# Altium PCB nails_PCB_v2_rectangles_no_grouns.PcbDoc
Units mm, origin at the board's own origin, x right, y up, seen from the top; angles counter-clockwise.
Board outline 16.25 x 42.65 mm, 4 copper layers (Top Layer, Mid-Layer 1, Internal Plane 1, Bottom Layer); 42 components, 49 nets, 225 pads, 94 vias.
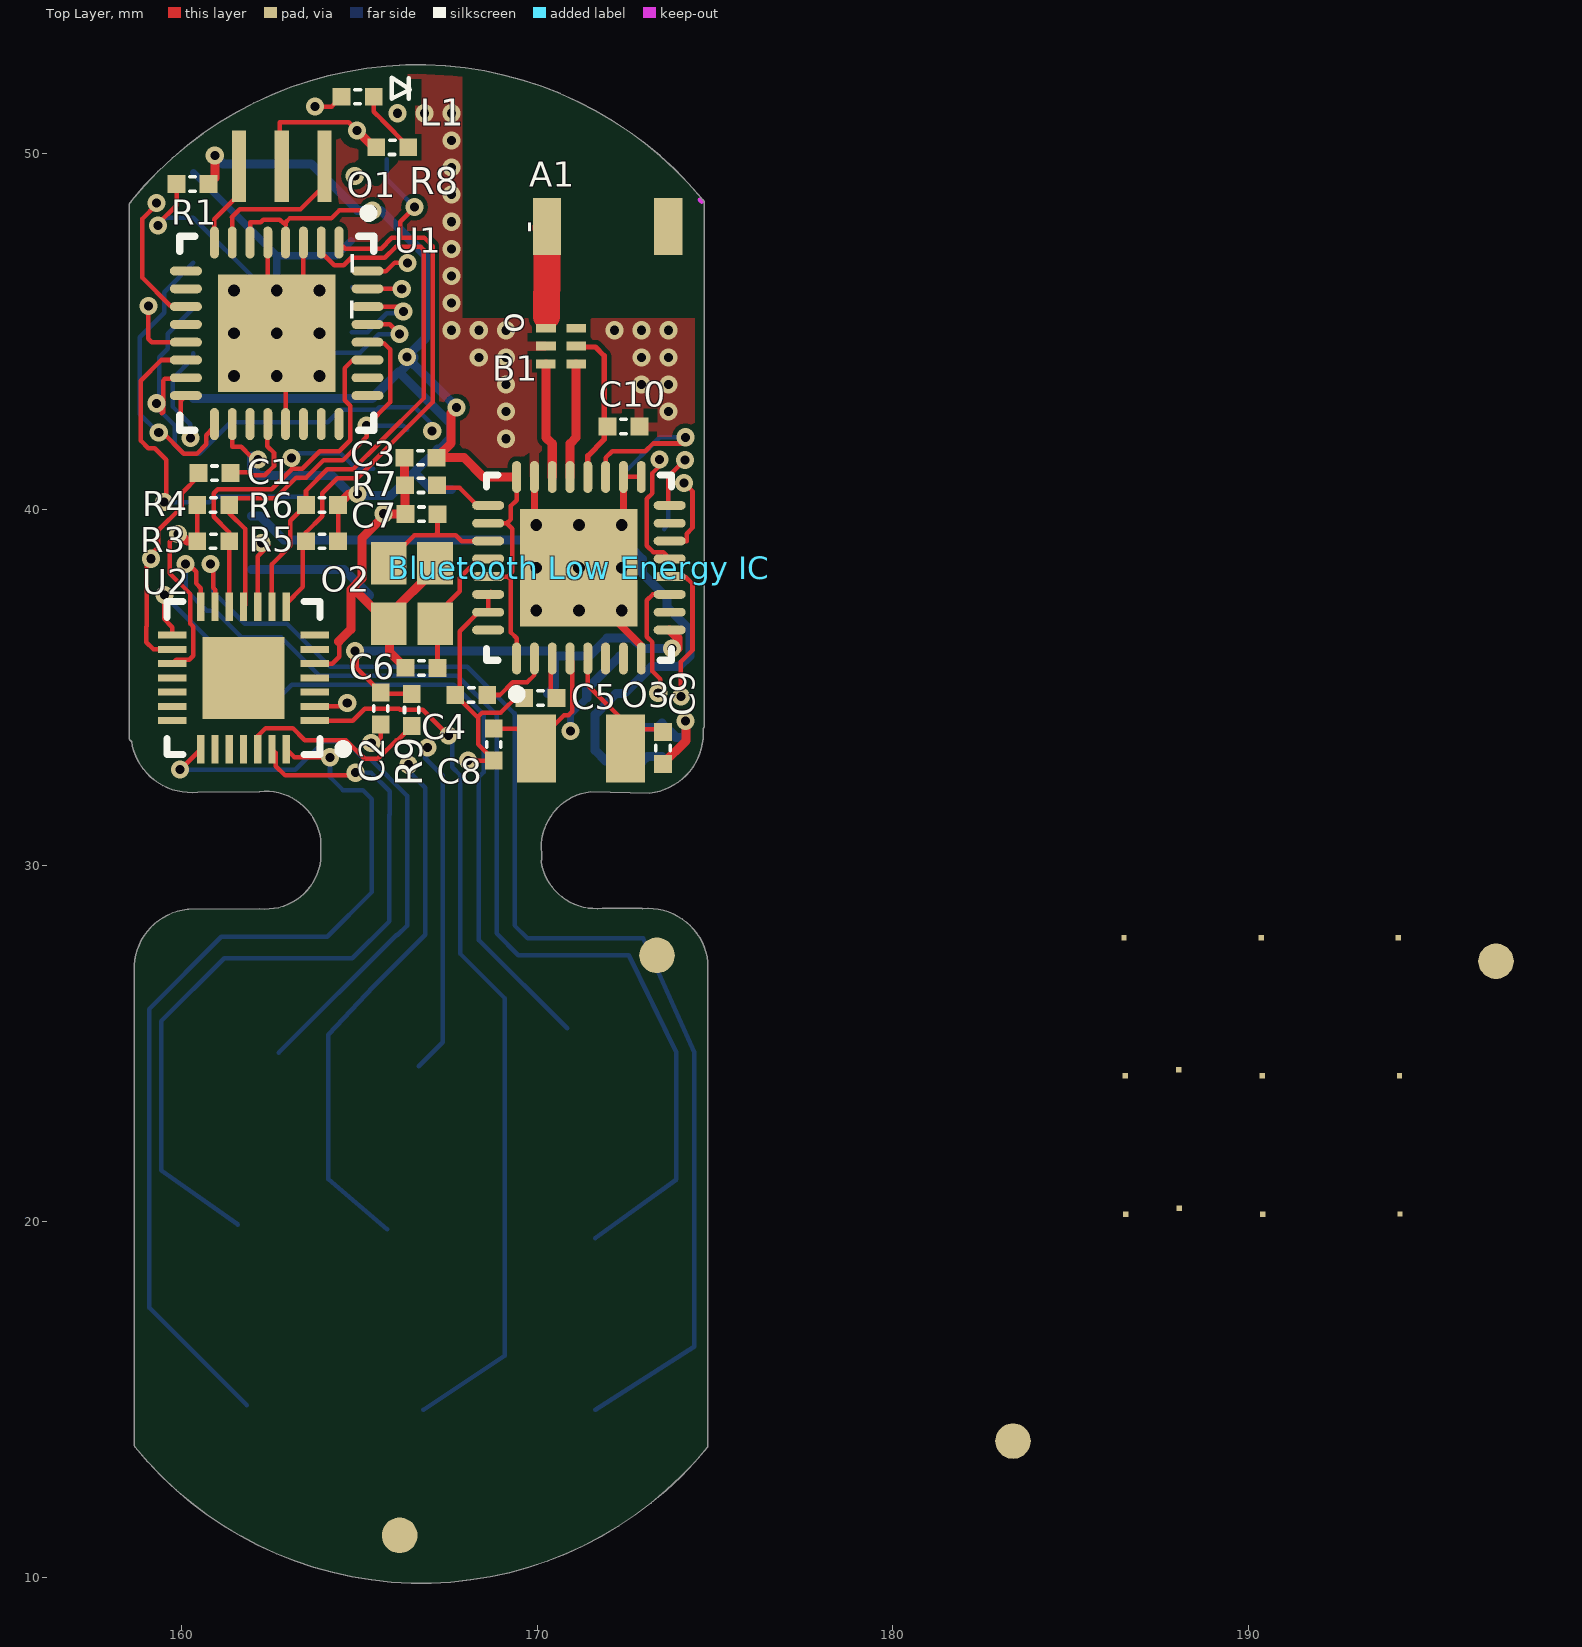
[diagram p0: Top Layer view]
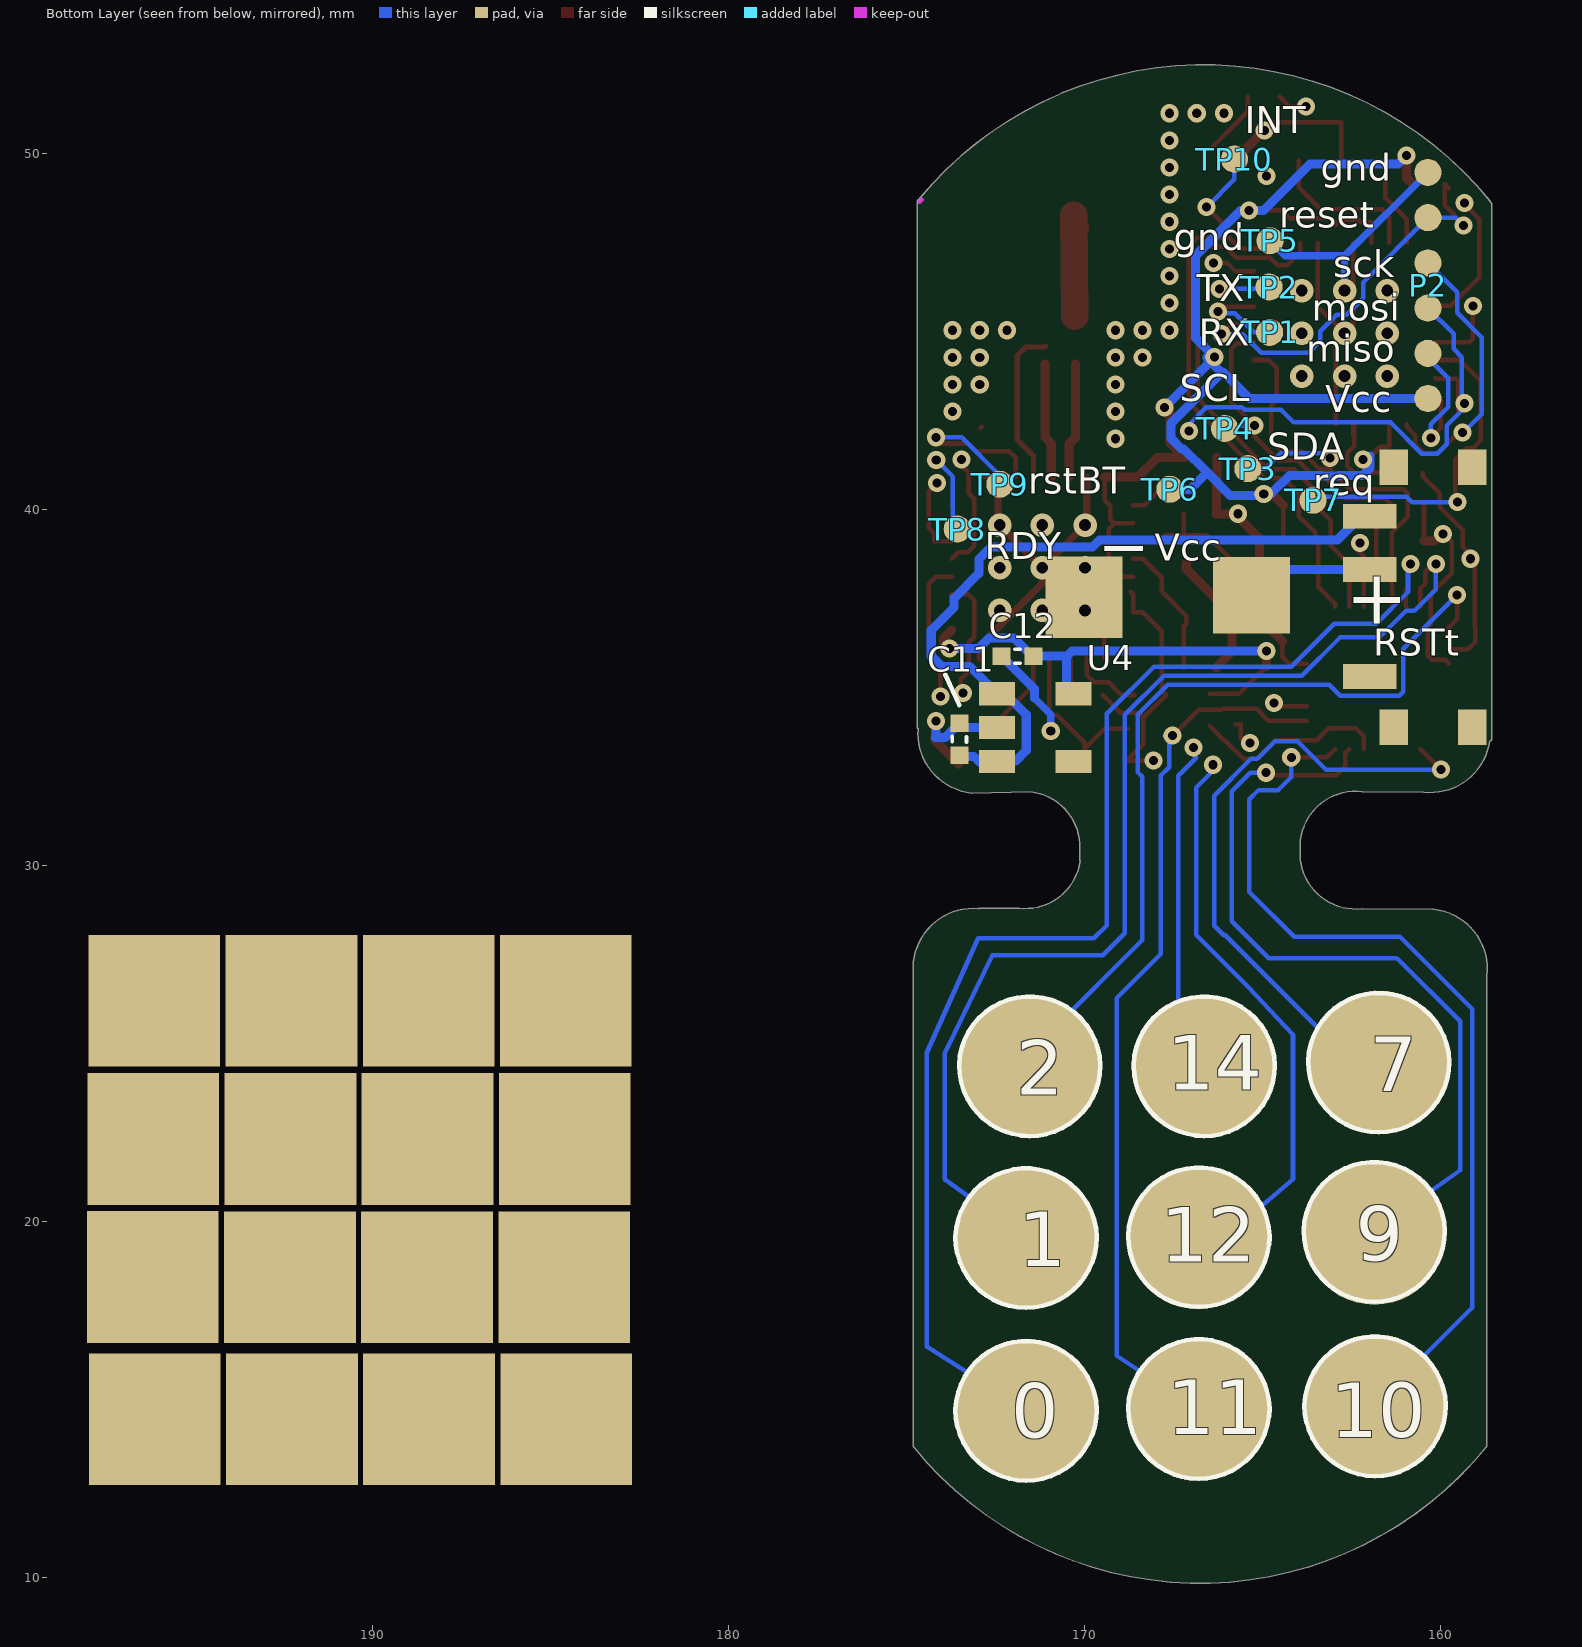
[diagram p1: Bottom Layer view, seen from below]
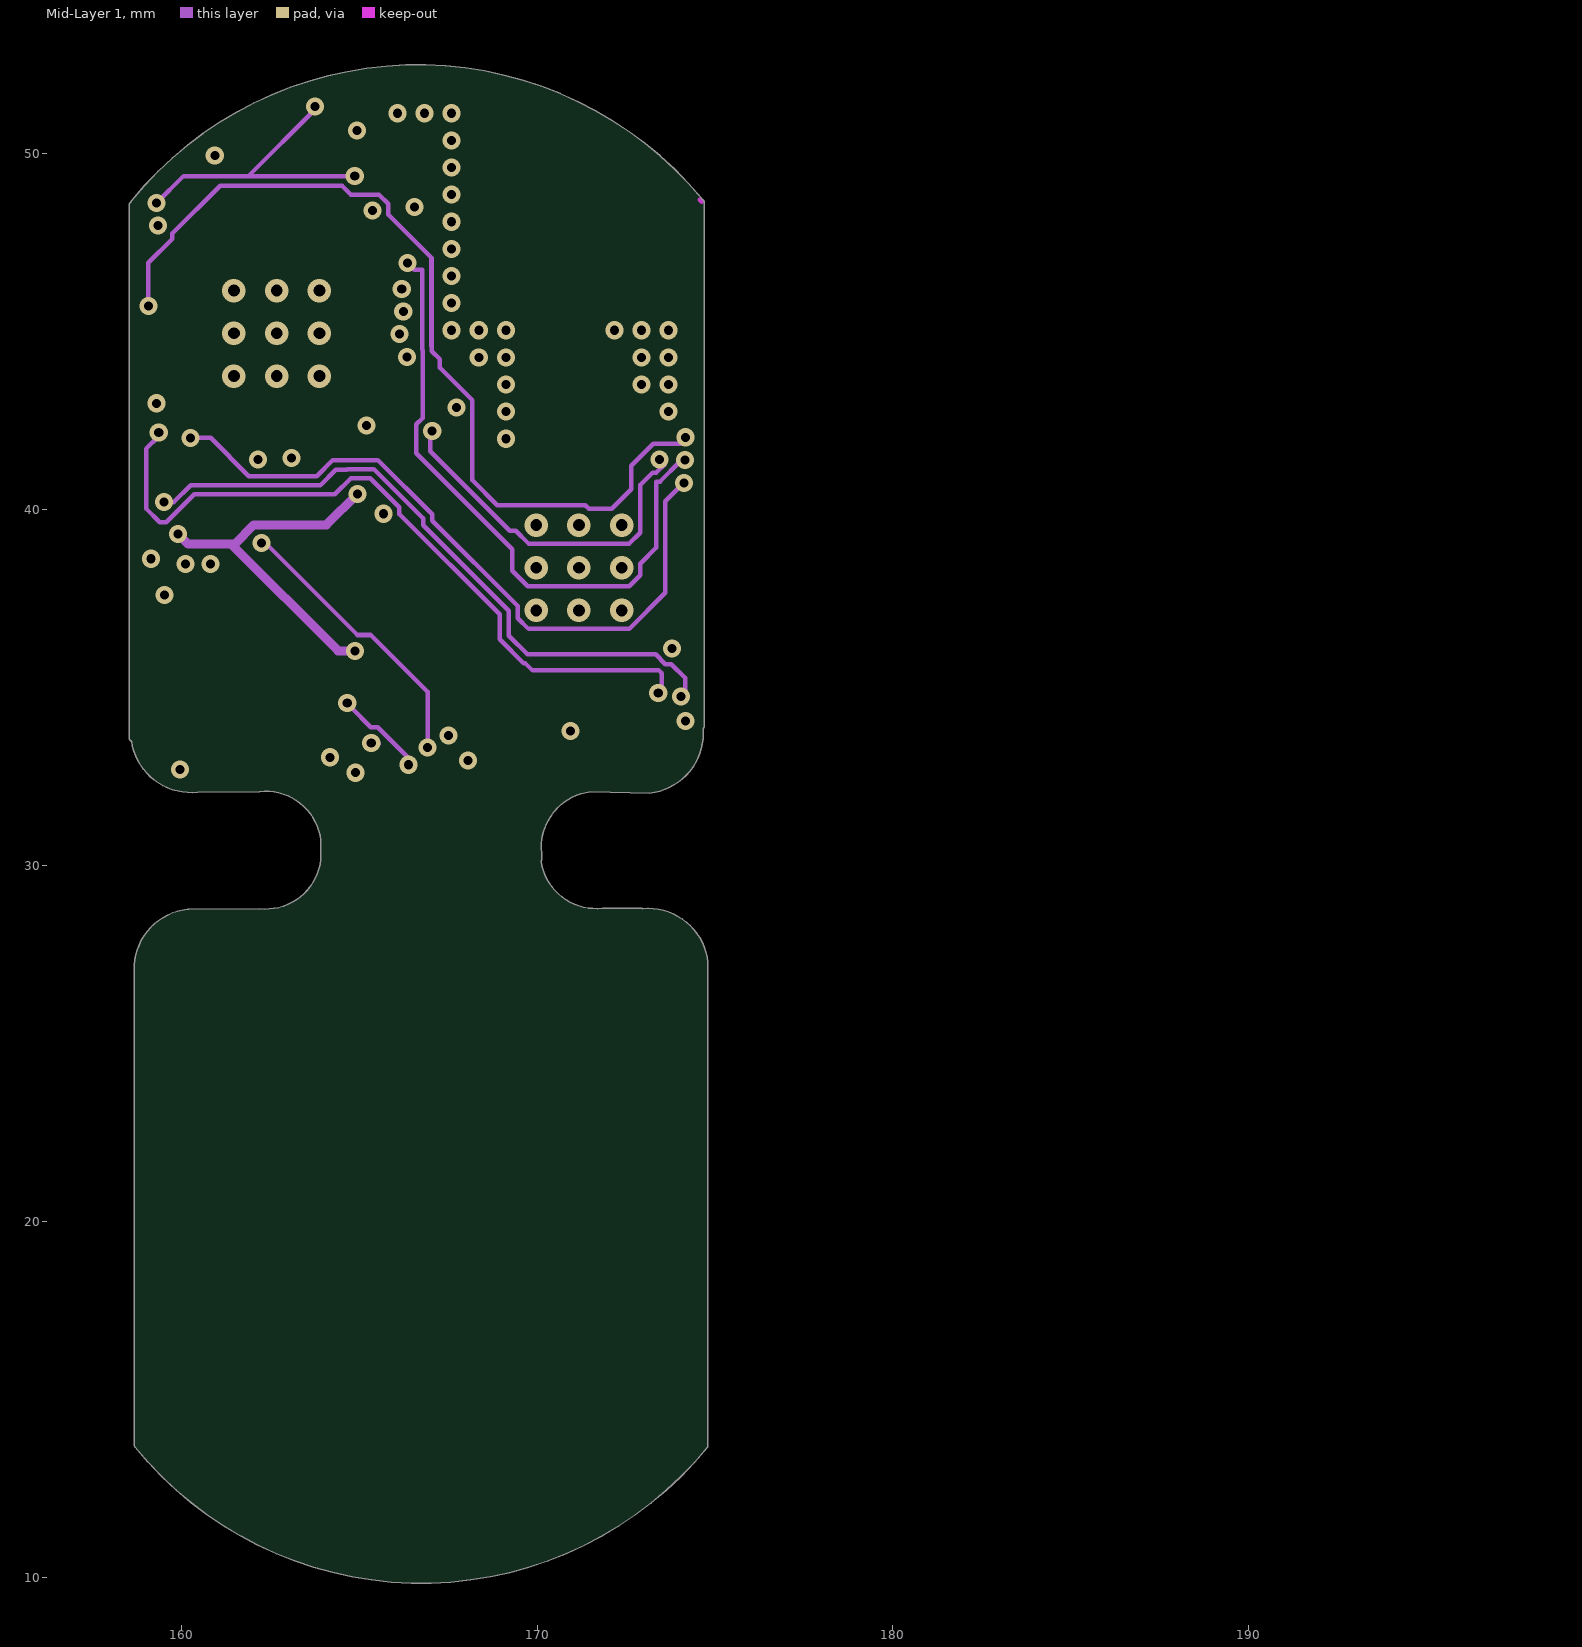
[diagram p2: Mid-Layer 1]
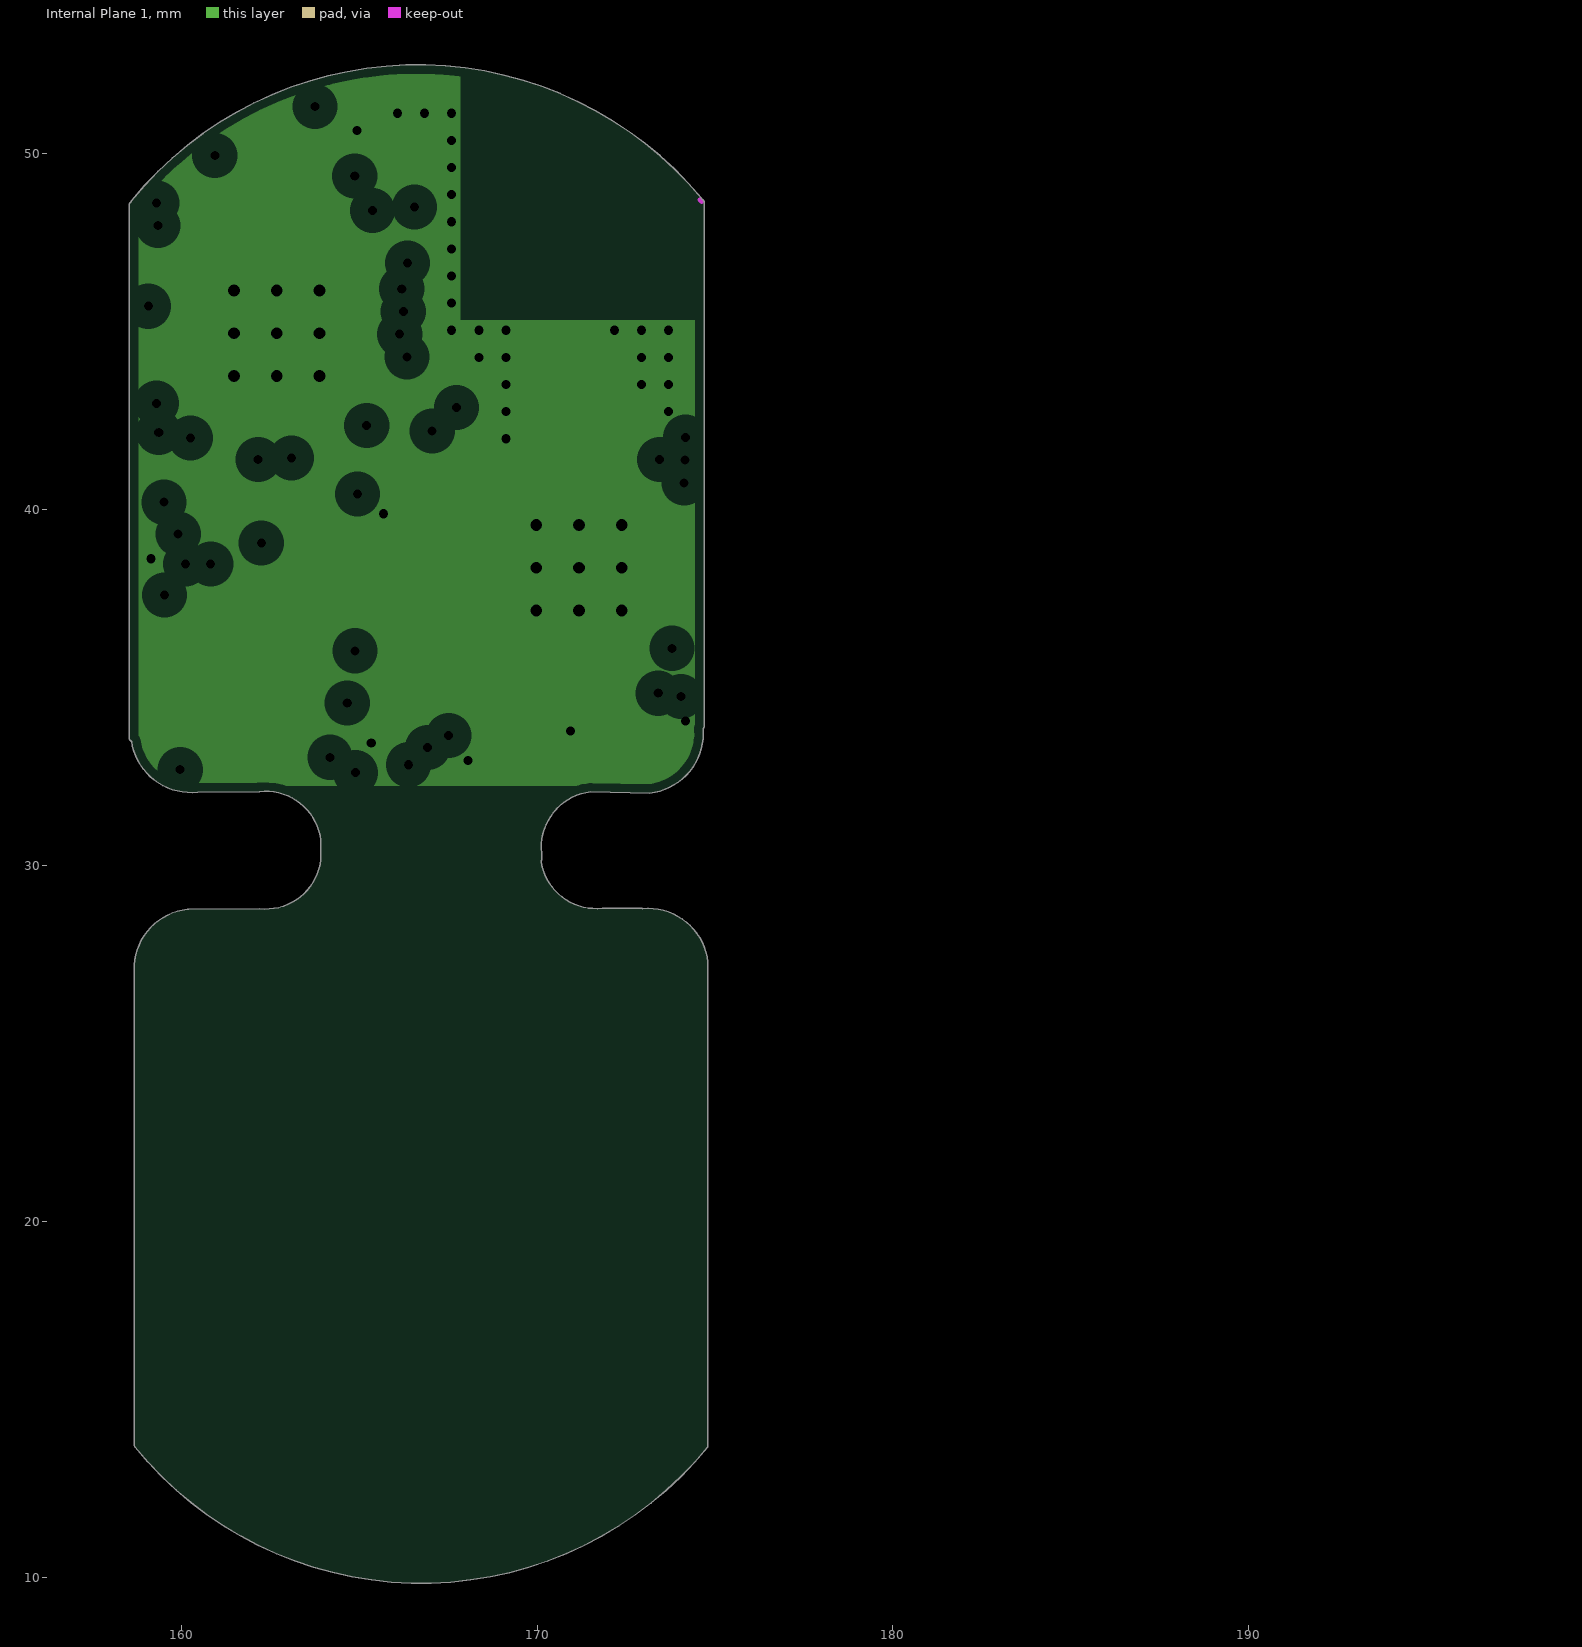
[diagram p3: Internal Plane 1, clearances drawn from the general rule]

## Layer stack, top to bottom
Top Layer: signal copper 0.0356
Dielectric: core 0.32, FR-4, Dk 4.8
Mid-Layer 1: signal copper 0.0356
Dielectric: prepreg 0.32, FR-4, Dk 4.8
Internal Plane 1: plane copper 0.0356, net GND
Dielectric: core 0.32, FR-4, Dk 4.8
Bottom Layer: signal copper 0.0356

## Board outline
158.69,13.715 158.69,26.907 cw(c158.753,26.92) 158.689,26.913 cw(c160.368,27.099) 160.181,28.778 cw(c160.188,28.715) 160.205,28.777 162.194,28.793 cw(c162.195,28.729) 162.195,28.793 162.194,28.793 cw(c162.195,28.729) 162.202,28.792 ccw(c162.374,30.344) 163.926,30.168 163.926,30.71 cw(c163.99,30.71) 163.927,30.718 ccw(c162.376,30.53) 162.204,32.082 cw(c162.197,32.146) 162.198,32.082 160.463,32.066 cw(c160.28,33.745) 158.608,33.502 cw(c158.614,33.565) 158.55,33.565 158.55,48.581 cw(c158.614,48.581) 158.592,48.641 cw(c158.655,48.643) 158.606,48.683 cw(c166.642,42.138) 174.62,48.752 cw(c174.571,48.711) 174.635,48.718 cw(c174.628,48.654) 174.692,48.654 174.692,33.9 cw(c174.628,33.9) 174.667,33.849 cw(c172.982,33.721) 174.671,33.721 cw(c172.982,33.721) 173.169,32.042 cw(c173.162,32.105) 173.161,32.042 171.505,32.076 ccw(c171.683,30.524) 170.13,30.352 cw(c170.067,30.345) 170.131,30.345 cw(c170.067,30.345) 170.131,30.345 170.131,30.178 cw(c170.067,30.178) 170.131,30.178 cw(c170.067,30.178) 170.114,30.135 ccw(c171.659,30.358) 171.832,28.806 cw(c171.839,28.742) 171.839,28.806 172.942,28.802 cw(c172.941,28.738) 172.972,28.794 cw(c173.121,27.111) 174.8,27.298 cw(c174.736,27.291) 174.8,27.291 174.8,13.702 cw(c174.736,13.702) 174.786,13.662 cw(c166.75,20.206) 158.704,13.674 cw(c158.754,13.715)

## Design rules (kind name [scope] priority, off if disabled: settings)
Clearance [All] p1: gap=0.127
HoleSize [All] p1: absolutevalues=TRUE maxlimit=2.54 minlimit=0.254 maxpercent=80.000 minpercent=20.000
PlaneClearance [All] p1: clearance=0.508
PlaneConnect [All] p1: planeconnectstyle=Direct reliefexpansion=0.508 reliefentries=4 reliefconductorwidth=0.254 reliefairgap=0.254
PolygonConnect [All] p1: connectstyle=Relief reliefconductorwidth=0.254 reliefentries=4 polygonreliefangle="90 Angle" airgapwidth=0.254
RoutingVias [All] p1: holewidth=0.254 width=0.508 viastyle="Through Hole" minholewidth=0.254 minwidth=0.508 maxholewidth=0.508 maxwidth=1.27
SolderMaskExpansion [All] p1: expansion=0.102
Width [All] p1: maxlimit=0.762 minlimit=0.127 preferedwidth=0.127
25 further rules are at their usual default settings.

## Components (designator, comment, footprint, x,y, rotation, side; value= is the part's Value field where it differs from the comment)
* "ON_OFF_SWITCH" SWTICH_SMD_SIDE 158.679,35.519 r90 bottom
A1 "2.45 GHz Chip antenna" 2450AT18A100E 170.546,47.842 r0 top
B1 "2.45 GHz Bulan" 2450BM14A0002 170.279,44.199 r90 top
"Bluetooth Low Energy IC" "nRF8001" QFN32_W_GND 171.196,38.354 r90 top
C1 "0.1uF" 0402W 160.555,41.031 r0 top
C2 "0.1uF" 0402W 165.608,34.036 r90 top
C3 "4.7uF" 0402W 166.342,41.465 r0 top
C4 "0.1uF" 0402W 167.767,34.798 r0 top
C5 "0.033uF" 0402W 169.709,34.713 r0 top
C6 "6pF" 0402W 166.37,35.56 r0 top
C7 "6pF" 0402W 166.37,39.878 r0 top
C8 "18pF" 0402W 168.783,33.02 r90 top
C9 "18pF" 0402W 173.536,32.927 r90 top
C10 "22pF 5%" 0402W 172.812,42.335 r180 top
C11 "10uF" 0402W 173.508,33.939 r270 bottom
C12 "10uF" 0402W 172.259,35.888 r180 bottom
L1 "LED" 0402W 164.577,51.604 r0 top
O1 "Resonator SMD" "Resonator SMD" 163.602,49.602 r270 top
O2 "16 MHz Crystal Cl=8pF" "2.5 x 2.0 crystal" 165.862,36.83 r90 top
O3 "32.768 Crystal Cl=12.5pF" "32.768 Crystal" 170.053,33.274 r0 top
P2 "6 pin smd 1.27mm female" "6pos 1.27mm" 168.292,49.608 r90 bottom
R1 "10K" 0402W 159.94,49.155 r0 top
R3 "1.8K" 0402W 161.29,39.116 r180 top
R4 "1.8K" 0402W 161.29,40.132 r180 top
R5 "4.7K" 0402W 163.576,39.116 r0 top
R6 "4.7K" 0402W 163.576,40.132 r0 top
R7 "22k 1%" 0402W 166.356,40.689 r0 top
R8 "330" 0402W 165.548,50.184 r0 top
R9 "20K" 0402W 166.48,34.76 r270 top
TP1 "Test point small" "TEST POINT SMD SUPER SMALL" 164.792,44.983 r270 bottom
TP2 "Test point small" "TEST POINT SMD SUPER SMALL" 164.805,46.258 r270 bottom
TP3 "Test point small" "TEST POINT SMD SUPER SMALL" 165.404,41.155 r270 bottom
TP4 "Test point small" "TEST POINT SMD SUPER SMALL" 166.057,42.283 r270 bottom
TP5 "Test point small" "TEST POINT SMD SUPER SMALL" 164.783,47.559 r270 bottom
TP6 "Test point small" "TEST POINT SMD SUPER SMALL" 167.596,40.576 r270 bottom
TP7 "Test point small" "TEST POINT SMD SUPER SMALL" 163.573,40.267 r270 bottom
TP8 "Test point small" "TEST POINT SMD SUPER SMALL" 173.568,39.459 r270 bottom
TP9 "Test point small" "TEST POINT SMD SUPER SMALL" 172.372,40.718 r270 bottom
TP10 "Test point small" "TEST POINT SMD SUPER SMALL" 165.782,49.852 r270 bottom
U1 "ATmega328P-MUR" 32M1-A_M 162.687,44.958 r270 top
U2 "MTCH6102" QFN28_no_gnd_conn 161.925,35.433 r180 top
U4 "MIC5205_VOLTAGE_REG" SOT-23-5 170.826,34.434 r270 bottom

## Footprints (in the part's own frame and the unit in brackets; to place one, negate y for a bottom-side part, rotate by r counter-clockwise, add the part's x,y. Pads: shape width x height; smd on the part's side, far side on the other; paste and mask are expansions set on the pad)
"2.5 x 2.0 crystal" [mm]
  rect 1.2x1 smd: 1(-0.033,-1.273) 2(1.667,-1.273) 3(1.667,0.026) 4(-0.033,0.025)
  body extent -0.46,-1.62 2.05,0.38, height 0.5
"6pos 1.27mm" [mil]
  round 30 smd: 1(-255.18,-312.9) 2(-205.22,-312.81) 3(-155.19,-312.82) 4(-105.18,-312.84) 5(-55.15,-312.85) 6(-5.14,-312.83)
"32.768 Crystal" [mm] "for BLE radio"
  rect 1.1x1.9 smd: 1(-0.07,0.019) 2(2.432,0.02)
  body extent -0.39,-0.71 2.81,0.78, height 0.9
32M1-A_M [mm] "QFN, 32-Leads, Body 5x5mm, Pitch 0.5mm, IPC Low Density"
  oval 0.9x0.25 smd: 1(-2.55,1.75) 2(-2.55,1.25) 3(-2.55,0.75) 4(-2.55,0.25) 5(-2.55,-0.25) 6(-2.55,-0.75) 7(-2.55,-1.25) 8(-2.55,-1.75) 17(2.55,-1.75) 18(2.55,-1.25) 19(2.55,-0.75) 20(2.55,-0.25) 21(2.55,0.25) 22(2.55,0.75) 23(2.55,1.25) 24(2.55,1.75)
  oval 0.25x0.9 smd: 9(-1.75,-2.55) 10(-1.25,-2.55) 11(-0.75,-2.55) 12(-0.25,-2.55) 13(0.25,-2.55) 14(0.75,-2.55) 15(1.25,-2.55) 16(1.75,-2.55) 25(1.75,2.55) 26(1.25,2.55) 27(0.75,2.55) 28(0.25,2.55) 29(-0.25,2.55) 30(-0.75,2.55) 31(-1.25,2.55) 32(-1.75,2.55)
  rect 3.3x3.3 smd: 33(0,0)
  silkscreen extent -3.5,-2.73 2.73,2.73, body extent -2.58,-2.58 2.58,2.58, height 1
0402W [mm]
  rect 0.5x0.5 smd: 1(-0.066,0) 2(0.834,-0.001)
  silkscreen extent 0.31,-0.2 0.46,0.2, body extent -0.08,-0.25 0.85,0.25, height 0.2
2450AT18A100E [mm] "Chip antenna 2.45 GHz"
  rect 0.8x1.6 smd: 1(-0.266,0.111) 2(3.135,0.111)
  body extent -0.14,-0.7 3.06,0.9, height 1.3
2450BM14A0002 [mm] "Balun for nRF8001"
  rect 0.25x0.55 smd: 1(0.901,0.027) 2(0.401,0.027) 3(-0.1,0.028) 4(-0.1,-0.822) 5(0.401,-0.823) 6(0.901,-0.823)
  body extent -0.39,-0.78 1.21,0.02, height 0.6
QFN28_no_gnd_conn [mm]
  rect 0.8x0.2 smd: 1(-1.829,1.356) 2(-1.829,0.956) 3(-1.829,0.556) 4(-1.829,0.156) 5(-1.829,-0.244) 6(-1.829,-0.644) 7(-1.829,-1.044) 15(2.171,-1.044) 16(2.171,-0.644) 17(2.171,-0.244) 18(2.171,0.156) 19(2.171,0.556) 20(2.171,0.956) 21(2.171,1.356)
  rect 0.2x0.8 smd: 8(-1.029,-1.844) 9(-0.629,-1.844) 10(-0.229,-1.844) 11(0.171,-1.844) 12(0.571,-1.844) 13(0.971,-1.844) 14(1.371,-1.844) 22(1.371,2.156) 23(0.971,2.156) 24(0.571,2.156) 25(0.171,2.156) 26(-0.229,2.156) 27(-0.629,2.156) 28(-1.029,2.156)
  rect 2.3x2.3 smd: 29(0.171,0.156)
  silkscreen extent -2.75,-1.99 2.32,2.31, body extent -1.83,-1.84 2.17,2.16, height 1
QFN32_W_GND [mm]
  oval 0.9x0.25 smd: 1(-2.532,1.769) 2(-2.532,1.269) 3(-2.532,0.769) 4(-2.532,0.269) 5(-2.532,-0.231) 6(-2.532,-0.731) 7(-2.532,-1.231) 8(-2.532,-1.731) 17(2.568,-1.731) 18(2.568,-1.231) 19(2.568,-0.731) 20(2.568,-0.231) 21(2.568,0.269) 22(2.568,0.769) 23(2.568,1.269) 24(2.568,1.769)
  oval 0.25x0.9 smd: 9(-1.732,-2.531) 10(-1.232,-2.531) 11(-0.732,-2.531) 12(-0.232,-2.531) 13(0.268,-2.531) 14(0.768,-2.531) 15(1.268,-2.531) 16(1.768,-2.531) 25(1.768,2.569) 26(1.268,2.569) 27(0.768,2.569) 28(0.268,2.569) 29(-0.232,2.569) 30(-0.732,2.569) 31(-1.232,2.569) 32(-1.732,2.569)
  rect 3.3x3.3 smd: 33(0.018,0.019)
  silkscreen extent -3.66,-2.58 2.62,2.62, body extent -2.56,-2.56 2.59,2.59, height 1
"Resonator SMD" [mm]
  rect 2x0.4 smd: 1(-0.05,-1.975) 2(-0.051,-0.775) 3(-0.051,0.425)
  body extent -0.77,-2.35 0.8,0.8, height 1.15
SOT-23-5 [mm]
  rect 0.65x1 smd: 1(-0.4,-1.625) 2(0.55,-1.625) 3(1.5,-1.625) 4(1.5,0.525) 5(-0.4,0.525)
  body extent -0.77,-1.68 1.88,0.58, height 1.1
SWTICH_SMD_SIDE [mm]
  rect 1.3x1.5 on Bottom Paste: 0(1.85,-0.575)
  rect 0.7x1.5 smd: 1(-0.2,3.3) 2(2.8,3.3) 3(4.3,3.3)
  rect 1x0.8 smd: NC(-1.625,0.425) NC(-1.625,2.625) NC(5.675,0.425) NC(5.675,2.625)
  body extent -1.4,-1.33 5.33,2.78, height 1.4
"TEST POINT SMD SUPER SMALL" [mil]
  round 30 smd: 0(0,0)

## Part data
*: "DPDT SMD Side Switch 240 mA at 5V"
A1: "for Bluetooth"
B1: "for nRF8001 chip"
C1 C2 C3 C4 C5 C6 C7 C8 C9 C10 C11 C12: library part Capacitor, "SMD Cap 1206"
L1: "LED SMD 1206/0603"
O1: "Build in caps"
O2: library part "16 MHz Crystal Wireless", "For BLE use"
O3: library part "32.768 Crystal"
R1 R3 R4 R5 R6 R7 R8 R9: library part Resistor
U1: "8-bit AVR Microcontroller, 32KB Flash, 1KB EEPROM, 2KB SRAM, 32-pin MLF, Industrial Grade (-40°C to 85°C)"
U4: "5V LDO SMD"

## Free pads (board coordinates)
  round 4 smd far side mask+0: 0(161.723,24.491) 0(161.85,14.839) 0(161.85,19.665) 0(166.676,24.364) 0(166.803,14.712) 0(166.803,19.538) 0(171.502,24.364) 0(171.629,14.712) 0(171.629,19.538)
  round 1 smd mask+0.5: 0(166.14,11.188) 0(173.369,27.483) 0(183.372,13.837) 0(196.941,27.318)
  rect 3.7x3.7 smd far side mask+0: 0(184.552,14.45) 0(184.563,26.206) 0(184.593,22.323) 0(184.607,18.442) 0(188.407,14.448) 0(188.418,26.205) 0(188.449,22.321) 0(188.462,18.44) 0(192.257,14.451) 0(192.269,26.208) 0(192.299,22.324) 0(192.312,18.443) 0(196.115,14.452) 0(196.127,26.208) 0(196.157,22.325) 0(196.17,18.444)
  rect 0.152x0.152 smd mask+0: 0(186.49,27.978) 0(186.52,24.095) 0(186.533,20.214) 0(188.028,24.265) 0(188.041,20.384) 0(190.343,27.979) 0(190.374,24.095) 0(190.387,20.214) 0(194.199,27.981) 0(194.229,24.097) 0(194.243,20.217)
  rect 2.159x2.159 smd far side: 3(165.3,37.6)
  rect 2.159x2.286 smd far side: 3(170.008,37.538)

## Via types
v1: diameter 0.508, hole 0.254, Top Layer to Bottom Layer, tented both sides, 75 vias
v2: diameter 0.66, hole 0.33, Top Layer to Bottom Layer, tented both sides, 18 vias
v3: diameter 0.508, hole 0.254, Top Layer to Bottom Layer, 1 vias

## Nets (pads, with @x,y where several pads share a name; then routed paths per layer and width w, separated by ;. In a path a pad name is that pad's centre, name@x,y a point inside that pad or via, vN(x,y) a via of type N, cw(c..) or ccw(c..) an arc to the next point about the centre after c; other vN are vias at no path point)
GND: "Bluetooth Low Energy IC.8" "Bluetooth Low Energy IC.17" "Bluetooth Low Energy IC.18" "Bluetooth Low Energy IC.23" "Bluetooth Low Energy IC.30" "Bluetooth Low Energy IC.31" "Bluetooth Low Energy IC.33" B1.2 C1.1 C2.1 C3.1 C4.1 C5.1 C6.1 C7.1 C8.1 C9.1 C10.1 C11.1 C12.1 O1.2 O2.2 O2.4 P2.6 pad.3@170.008,37.538 R7.1 R8.1 TP5.0 U1.3 U1.5 U1.21 U1.33 U2.5 U2.16 U4.2 | length 63.3
  Top Layer w0.127: 159.034,37.387 159.034,38.625 159.361,38.952 159.361,39.425 160.015,40.079 160.015,40.462 160.489,40.936 C1.1 ; 159.035,37.386 159.035,36.729 159.023,36.717 159.023,36.281 159.226,36.077 U2.16 ; U1.5 162.437,45.208 v2(162.687,44.958) ; O1.2@162.774,49.806 162.774,50.883 164.714,50.883 v1(164.941,50.657) ; U1.21 162.937,44.708 v2(162.687,44.958) ; U1.3 163.437,45.708 v2(162.687,44.958) ; U2.5 164.248,35.677 164.44,35.869 164.44,36.222 164.466,36.248 164.466,36.267 164.432,36.301 ; v1@165.548,33.425 165.496,33.477 165.608,33.59 C2.1 C2.1@165.754,33.97 ; v1(168.06,32.954) C8.1 168.783,32.974 168.344,33.414 168.344,34.155 ; 168.698,37.693 168.627,37.622 168.627,37.122 168.356,37.122 167.826,36.592 167.826,34.923 C4.1 168.344,34.155 ; C5.1@169.479,34.798 168.976,34.295 168.455,34.295 168.344,34.183 168.344,34.155 ; 172.427,40.922 172.927,40.922 ; C10.1 C10.1@172.927,42.287
  Top Layer w0.203: 169.927,40.922 169.927,39.622 v2(169.977,39.572) v2(171.177,38.372) ; v1@170.939,33.8 170.939,33.785 v1(170.942,33.782) ; 172.427,40.922 172.427,39.622 v2(172.377,39.572) v2(171.177,38.372) ; 172.927,35.822 172.927,36.18 171.177,37.93 v2(171.177,38.372)
  Top Layer w0.254: 164.43,36.302 164.769,36.641 164.769,37.757 ; v1(164.941,50.657) R8.1@165.488,50.11 ; C3.1 166.276,40.702 R7.1 166.29,39.892 C7.1 165.696,39.878 v1(165.685,39.888) 165.685,39.805 165.082,39.202 165.082,38.071 164.769,37.757 ; C6.1 165.855,36.009 165.855,36.779 O2.4 ; O2.2 167.135,38.337 165.837,37.038 O2.4 ; C9.1 174.19,33.514 174.19,34.041 v1(174.168,34.063) ; 164.769,37.757 164.877,37.757 O2.4
  Mid-Layer 1 w0.127: v1(164.941,50.657) v1@164.948,50.649 ; v1@165.383,33.509 165.464,33.509 v1@165.548,33.425
  Bottom Layer w0.127: v1@167.946,33.067 v1(168.06,32.954)
  Bottom Layer w0.203: P2.6 162.687,47.136 ; v2(162.687,46.158) 162.687,47.136 ; TP5.0 164.36,47.136 162.687,47.136 ; v1(170.942,33.782) 170.942,34.252 171.397,34.707
  Bottom Layer w0.254: 171.397,34.707 171.397,34.963 172.322,35.888 C12.1 ; U4.2 173.387,33.884 C11.1 173.906,33.607 174.178,33.607 174.168,33.616 v1(174.168,34.063)
  other v1: 165.343,33.449 159.152,38.625 169.126,41.996 169.126,42.758 173.698,42.758 169.126,43.52 172.936,43.52 173.698,43.52 168.364,44.282 169.126,44.282 172.936,44.282 173.698,44.282 167.602,45.044 168.364,45.044 169.126,45.044 172.174,45.044 172.936,45.044 173.698,45.044 167.602,45.806 167.602,46.568 167.602,47.33 167.602,48.092 167.602,48.854 167.602,49.616 167.602,50.378 166.078,51.14 166.84,51.14 167.602,51.14
  other v2: 169.977,37.172 171.177,37.172 172.377,37.172 169.977,38.372 172.377,38.372 171.177,39.572 161.487,43.758 162.687,43.758 163.887,43.758 161.487,44.958 163.887,44.958 161.487,46.158 163.887,46.158
INT: R5.1 TP10.0 U1.1 U2.8 | length 17.8
  Top Layer w0.127: U2.8 162.954,37.362 163.425,37.833 163.425,39.031 R5.1 163.51,39.362 163.97,39.822 163.97,40.46 164.392,40.882 164.765,40.882 164.773,40.89 164.945,40.89 165.836,41.781 165.836,41.793 167.065,43.023 167.065,47.41 166.837,47.638 166.156,47.638 ; U1.1 164.609,47.336 165.621,47.336 165.923,47.638 166.156,47.638 ; v1(166.562,48.503) 166.156,48.096 166.156,47.638
  Bottom Layer w0.127: TP10.0 165.782,49.283 v1(166.562,48.503)
LED1: L1.1 U1.11 | length 13.4
  Top Layer w0.127: v1(159.314,48.621) 159.314,48.579 158.905,48.17 158.905,46.524 159.701,45.728 160.117,45.728 U1.11 ; v3(163.766,51.328) 164.235,51.328 L1.1
  Mid-Layer 1 w0.127: v1(159.314,48.621) 160.07,49.377 161.895,49.377 ; v3(163.766,51.328) 163.766,51.248 161.895,49.377 ; v1(164.879,49.377) 161.895,49.377
  Bottom Layer w0.127: v3@163.68,51.345 163.749,51.345 v3(163.766,51.328)
MISO: "Bluetooth Low Energy IC.14" P2.2 U1.16 | length 26.7
  Top Layer w0.127: U1.16 159.987,43.058 159.987,42.296 v1(160.263,42.021) ; 173.727,39.122 174.207,39.122 174.207,39.331 174.368,39.492 174.368,40.517 v1(174.135,40.75) ; v1(174.135,40.75) 174.152,40.767 174.193,40.767 174.176,40.75 v1(174.135,40.75)
  Mid-Layer 1 w0.127: v1(160.263,42.021) 160.83,42.021 161.904,40.947 163.81,40.947 164.262,41.398 165.53,41.398 167.058,39.87 167.058,39.696 169.457,37.297 169.457,36.957 169.762,36.652 172.593,36.652 173.606,37.665 173.606,40.238 174.151,40.783 174.167,40.767 174.193,40.767 174.176,40.75 v1(174.135,40.75)
  Bottom Layer w0.127: v1(160.263,42.021) 160.263,42.4 159.773,42.89 159.773,43.698 160.347,44.272 P2.2
MOSI: "Bluetooth Low Energy IC.13" P2.3 U1.15 | length 28.6
  Top Layer w0.127: v1(159.313,42.992) 159.45,42.992 159.463,42.979 159.463,42.706 159.497,42.739 159.497,43.628 159.545,43.677 160.106,43.677 U1.15 ; v1(173.445,41.409) 173.533,41.321 173.243,41.031 173.243,40.467 173.087,40.311 173.087,38.992 173.272,38.807 173.543,38.807 173.727,38.622
  Mid-Layer 1 w0.127: v1(167.056,42.215) 167.003,42.162 167.003,41.649 169.237,39.415 169.399,39.415 169.762,39.052 172.593,39.052 172.898,39.357 172.898,40.696 ; 172.897,40.697 173.247,41.046 173.351,41.046 173.587,41.282 173.572,41.282 v1(173.445,41.409)
  Bottom Layer w0.127: P2.3 159.624,44.944 159.624,44.52 159.392,44.288 159.392,42.992 159.193,42.992 159.818,42.366 159.818,41.836 160.079,41.576 160.515,41.576 161.396,42.456 164.12,42.456 164.473,42.809 165.496,42.809 165.57,42.883 166.57,42.883 167.056,42.397 v1(167.056,42.215)
Net*_3: *.3 C11.2 U4.1 U4.3 | length 20.7
  Bottom Layer w0.254: *.3 162.22,39.819 162.886,39.152 169.571,39.152 169.767,38.956 172.619,38.956 172.961,38.614 172.961,38.211 173.656,37.516 173.656,37.259 174.298,36.616 174.298,35.898 174.001,35.6 173.218,35.6 U4.1 172.217,34.834 171.63,34.246 171.63,33.242 171.93,32.942 172.443,32.942 U4.3 ; U4.3@172.948,32.917 173.106,33.075 C11.2@173.509,33.075
NetA1_1: A1.1 B1.1 | length 2.9
  Top Layer w0.762: A1.1@170.252,47.924 A1.1 ; 170.266,45.431 A1.1@170.295,48.284
NetB1_3: "Bluetooth Low Energy IC.22" B1.3 | length 3.3
  Top Layer w0.254: B1.3 170.251,42.031 170.427,41.855 170.427,40.922
NetB1_4: "Bluetooth Low Energy IC.21" B1.4 | length 3.2
  Top Layer w0.254: 170.927,40.922 170.927,41.861 171.101,42.034 B1.4
NetB1_5: "Bluetooth Low Energy IC.20" B1.5 C10.2 | length 4.5
  Top Layer w0.152: B1.5 171.129,44.573 171.641,44.573 171.886,44.327 171.886,41.975 171.427,41.516 171.427,40.922
"NetBluetooth Low Energy IC_2": "Bluetooth Low Energy IC.2" C4.2 | length 2
  Top Layer w0.127: C4.2 168.958,34.797 169.314,35.153 169.72,35.153 169.927,35.36 169.927,35.822
"NetBluetooth Low Energy IC_3": "Bluetooth Low Energy IC.3" C5.2 | length 1
  Top Layer w0.127: C5.2@170.379,34.797 170.379,35.774 170.427,35.822
"NetBluetooth Low Energy IC_4": "Bluetooth Low Energy IC.4" C8.2 O3.1 | length 4.5
  Top Layer w0.127: C8.2 169.422,33.854 O3.1 169.983,33.452 170.758,34.227 170.885,34.227 170.984,34.326 170.984,35.765 170.927,35.822
"NetBluetooth Low Energy IC_5": "Bluetooth Low Energy IC.5" C9.2 O3.2 | length 3.7
  Top Layer w0.127: 171.427,35.822 171.427,35.075 172.485,34.017 172.485,33.666 172.659,33.84 C9.2@173.537,33.84
"NetBluetooth Low Energy IC_25": "Bluetooth Low Energy IC.25" R7.2 | length 1.7
  Top Layer w0.127: R7.2 167.264,40.614 167.827,40.614 168.318,40.122 168.627,40.122
"NetBluetooth Low Energy IC_27": "Bluetooth Low Energy IC.27" C7.2 O2.3 | length 3.9
  Top Layer w0.127: O2.3 165.836,38.568 166.556,39.288 167.135,39.288 ; C7.2 167.204,39.357 167.135,39.288 ; 168.627,39.122 168.621,39.116 167.886,39.116 167.714,39.288 167.135,39.288
"NetBluetooth Low Energy IC_28": "Bluetooth Low Energy IC.28" C6.2 O2.1 | length 3.9
  Top Layer w0.127: C6.2 167.204,36.728 O2.1 167.135,37.016 167.826,37.707 167.826,38.092 168.356,38.622 168.627,38.622
NetC1_2: C1.2 U1.20 | length 3
  Top Layer w0.127: C1.2 161.419,41.059 161.893,41.059 161.982,40.97 162.351,40.97 162.611,41.23 162.611,41.598 162.42,41.789 162.42,42.391 U1.20 U1.20@162.437,42.077
NetL1_2: L1.2 R8.2 | length 1.8
  Top Layer w0.127: L1.2 165.411,51.186 165.633,50.963 165.633,50.956 166.382,50.207 R8.2
NetO1_1: O1.1 U1.8 | length 2.7
  Top Layer w0.127: U1.8 160.937,48.164 161.54,48.767 O1.1@161.54,49.925
NetO1_3: O1.3 U1.7 | length 4.4
  Top Layer w0.127: U1.7 161.437,48.21 161.426,48.221 161.644,48.439 163.355,48.439 163.974,49.057 O1.3@163.974,49.806
RDY: "Bluetooth Low Energy IC.16" TP8.0 U1.32 | length 22.8
  Top Layer w0.127: U1.32 165.249,46.696 165.752,46.696 166.002,46.945 166.353,46.945 v1(166.365,46.933) ; 173.727,40.122 173.69,40.159 173.69,40.934 v1(174.158,41.402) v1@174.269,41.402
  Mid-Layer 1 w0.127: v1(166.365,46.933) 166.553,46.745 166.781,46.745 166.781,44.489 166.789,44.482 166.789,42.577 166.611,42.399 166.611,41.587 169.306,38.893 169.306,38.288 169.742,37.852 172.593,37.852 172.898,38.157 172.898,38.485 173.352,38.939 173.352,40.792 173.457,40.792 v1@174.013,41.348
  Bottom Layer w0.127: TP8.0 173.69,39.581 173.69,40.934 v1(174.158,41.402)
REQ: "Bluetooth Low Energy IC.12" TP7.0 U1.14 | length 32.2
  Top Layer w0.127: v1(159.52,40.213) 159.533,40.213 159.583,40.163 159.583,41.407 159.261,41.729 159.261,41.732 159.08,41.732 158.868,41.944 158.868,43.628 159.448,44.208 U1.14 ; 173.727,38.122 174.168,38.122 174.368,37.922 174.368,36.057 174.044,35.733 v1(174.044,34.753)
  Mid-Layer 1 w0.127: v1(159.52,40.213) 159.789,40.213 160.269,40.693 163.915,40.693 164.347,41.124 164.648,41.124 164.668,41.144 165.417,41.144 166.796,39.765 166.804,39.765 166.804,39.564 169.203,37.166 169.203,36.464 169.73,35.937 173.333,35.937 173.606,35.664 173.771,35.664 174.158,35.277 174.158,34.868 v1(174.044,34.753)
  Bottom Layer w0.127: v1(159.52,40.213) 160.789,40.213 160.936,40.36 163.48,40.36 TP7.0
RESET: P2.5 R1.1 U1.29 | length 11.7
  Top Layer w0.127: v1@159.379,48.015 v1(159.35,47.986) 159.35,48.028 159.874,48.552 R1.1 R1.1@159.759,49.039 ; U1.29@165.256,45.189 U1.29 165.866,45.208 v1(166.141,44.933)
  Bottom Layer w0.127: v1(159.35,47.986) 159.571,48.207 P2.5 162.166,46.386 162.166,45.942 162.63,45.479 162.903,45.479 163.366,45.015 163.366,44.742 163.697,44.412 165.029,44.412 165.55,44.933 v1(166.141,44.933)
RST_BT: "Bluetooth Low Energy IC.19" TP9.0 U1.13 | length 33.4
  Top Layer w0.127: v1(159.08,45.72) 159.08,44.804 159.179,44.704 160.133,44.704 U1.13 ; 171.927,40.922 171.927,41.457 171.925,41.46 172.113,41.648 173.045,41.648 173.259,41.862 174.269,41.862 174.269,42.095 174.211,42.037 v1(174.168,42.037)
  Mid-Layer 1 w0.127: v1(159.08,45.72) 159.08,46.937 159.759,47.616 159.759,47.766 161.097,49.105 164.522,49.105 164.773,48.854 165.561,48.854 165.821,48.594 165.821,48.295 167.035,47.08 167.035,44.595 167.043,44.587 167.043,44.456 167.273,44.226 167.273,43.988 168.186,43.076 168.186,40.825 168.88,40.131 171.355,40.131 171.46,40.026 172.095,40.026 172.643,40.574 172.643,41.236 173.261,41.854 174.028,41.854 174.211,42.037 v1(174.168,42.037)
  Bottom Layer w0.127: TP9.0 172.372,40.965 173.444,42.037 v1(174.168,42.037)
RST_TOUCH: R9.2 U2.26 | length 5.5
  Top Layer w0.127: U2.26 162.154,33.647 162.375,33.868 163.133,33.868 163.472,33.529 164.633,33.529 165.158,33.004 165.527,33.004 166.052,33.529 166.083,33.529 R9.2
RX: TP1.0 U1.30 | length 2.8
  Top Layer w0.127: U1.30 166.103,45.708 v1(166.243,45.568)
  Bottom Layer w0.127: TP1.0 165.238,44.983 165.777,45.522 166.198,45.522 v1(166.243,45.568)
RX0: pad.0@171.629,14.712 U2.13 | length 37
  Top Layer w0.127: v1(160.833,38.481) 160.858,38.481 160.905,38.528 160.905,37.806 160.963,37.748 160.963,37.287 U2.13
  Bottom Layer w0.127: v1(160.833,38.481) 160.858,38.481 v1@160.905,38.528 ; v1@160.905,38.571 v1@160.905,38.528 ; 169.351,34.283 168.041,35.593 164.185,35.593 162.975,36.803 161.793,36.803 160.905,37.691 v1@160.905,38.528 ; 169.369,34.283 169.369,28.323 169.734,27.958 172.972,27.958 ; pad.0@171.629,14.712 174.423,16.49 174.423,24.745 172.98,27.968
RX1: pad.0@171.629,19.538 U2.14 | length 32.1
  Top Layer w0.127: v1(160.122,38.481) 160.122,38.505 160.148,38.531 160.425,38.255 160.425,37.93 160.555,37.8 160.555,37.279 U2.14
  Bottom Layer w0.127: v1(160.122,38.481) 160.122,38.567 160.125,38.571 160.125,37.759 160.724,37.16 160.961,37.16 161.708,36.413 162.816,36.413 163.889,35.339 167.762,35.339 168.864,34.238 168.864,28.1 169.477,27.486 172.579,27.485 172.582,27.485 ; pad.0@171.629,19.538 173.915,21.189 173.915,24.745 172.576,27.491
RX2: pad.0@171.502,24.364 U2.15 | length 22.4
  Top Layer w0.127: v1(159.531,37.602) 159.525,37.596 159.525,36.933 159.754,36.704 U2.15
  Bottom Layer w0.127: v1(159.531,37.602) 161.038,36.096 161.038,34.89 161.15,34.779 162.807,34.779 163.114,35.085 167.657,35.085 168.504,34.238 168.504,32.633 168.367,32.496 168.367,27.912 pad.0@170.846,25.434
RX3: U2.18
RX4: U2.19
RX5: U2.20
RX6: U2.21
RX7: pad.0@161.723,24.491 U2.22 | length 16.9
  Top Layer w0.127: v1(159.976,32.699) U2.22
  Bottom Layer w0.127: v1(159.976,32.699) 163.208,32.699 164,33.491 164.648,33.491 165.135,33.004 165.314,33.004 166.348,31.97 166.348,28.314 166.078,28.043 ; pad.0@162.739,24.745 166.057,28.063
RX8: U2.23
RX9: pad.0@161.85,19.665 U2.27 | length 22.3
  Top Layer w0.127: U2.27 162.664,33.168 162.664,32.798 162.922,32.54 164.853,32.54 164.897,32.584 v1(164.897,32.614)
  Bottom Layer w0.127: pad.0@161.596,19.919 159.437,21.443 159.437,25.634 161.215,27.4 164.813,27.4 165.855,28.441 165.855,31.427 165.858,31.431 165.858,32.094 165.338,32.614 v1(164.897,32.614) 164.897,32.751 v1@164.891,32.757
RX10: pad.0@161.85,14.839 U2.28 | length 25.8
  Top Layer w0.127: U2.28 163.185,33.047 v1(164.184,33.047)
  Bottom Layer w0.127: pad.0@161.85,14.839 159.102,17.588 159.102,25.974 161.132,28.004 164.106,28.004 165.364,29.262 165.364,31.868 165.105,32.127 164.548,32.127 164.184,32.491 v1(164.184,33.047)
RX11: pad.0@166.803,14.712 U2.1 | length 25.2
  Top Layer w0.127: U2.1 164.827,34.077 165.157,34.408 165.277,34.408 165.279,34.41 166.126,34.41 166.151,34.386 166.788,34.386 v1(167.519,33.655)
  Bottom Layer w0.127: pad.0@166.803,14.712 169.089,16.236 169.089,26.269 ; v1@167.743,33.655 v1(167.519,33.655) 167.615,33.559 167.615,32.77 167.848,32.537 167.848,27.522 169.088,26.283
RX12: pad.0@166.803,19.538 U2.2 | length 18.6
  Top Layer w0.127: U2.2 164.576,34.477 v1(164.668,34.569)
  Mid-Layer 1 w0.127: v1(164.668,34.569) 164.775,34.463 164.775,34.449 165.33,33.893 165.527,33.893 166.386,33.034 v1(166.386,32.838)
  Bottom Layer w0.127: pad.0@165.787,19.792 164.136,21.189 164.136,25.253 165.415,26.612 166.86,28.057 166.86,32.194 166.386,32.668 v1(166.386,32.838)
RX13: U2.4
RX14: pad.0@166.676,24.364 U2.10 | length 19.6
  Top Layer w0.127: U2.10 162.154,38.699 162.447,38.991 162.373,39.065 162.357,39.065 162.328,39.036 162.284,39.036 v1(162.255,39.065)
  Mid-Layer 1 w0.127: v1(162.255,39.065) 162.284,39.036 162.328,39.036 162.357,39.065 162.373,39.065 164.956,36.482 165.329,36.482 166.929,34.882 v1(166.929,33.325)
  Bottom Layer w0.127: pad.0@166.676,24.364 167.355,25.043 167.355,32.531 166.85,33.036 166.929,33.115 v1(166.929,33.325)
SCK: "Bluetooth Low Energy IC.11" P2.4 U1.17 | length 32.3
  Top Layer w0.127: v1(159.374,42.177) 159.478,42.177 160.079,41.576 160.447,41.576 160.707,41.836 160.707,42.099 160.937,42.328 U1.17 ; v1(173.406,34.849) 173.468,34.911 173.468,35.24 173.243,35.466 173.243,36.278 173.087,36.434 173.087,37.455 173.254,37.622 173.727,37.622 173.744,37.605
  Mid-Layer 1 w0.127: v1(159.374,42.177) 159.374,42.07 159.017,41.713 159.017,40.036 159.405,39.647 159.583,39.647 160.374,40.439 164.322,40.439 164.773,40.89 165.312,40.89 166.13,40.072 166.13,39.88 168.949,37.061 168.949,36.359 169.625,35.683 169.676,35.683 169.873,35.485 173.425,35.485 173.501,35.41 173.501,34.944 v1(173.406,34.849)
  Bottom Layer w0.127: v1(159.374,42.177) 159.336,42.215 159.313,42.215 158.839,42.689 158.839,44.85 159.525,45.536 159.525,46.115 P2.4
SCL: R4.1 TP4.0 U1.28 U2.11 | length 12.3
  Top Layer w0.127: U2.11 161.797,37.32 161.797,39.464 161.356,39.904 R4.1 161.543,40.319 162.65,40.319 163.23,40.898 163.512,40.898 164.004,41.39 164.549,41.39 165.214,42.055 v1(165.214,42.364) 165.877,43.028 165.877,44.505 165.699,44.684 165.261,44.684 U1.28
  Bottom Layer w0.127: v1(165.214,42.364) 166.244,42.364 TP4.0@166.357,42.251
SDA: R3.1 TP3.0 U1.27 U2.12 | length 13.5
  Top Layer w0.127: U2.12 161.354,37.9 161.356,37.902 R3.1 161.356,39.363 160.916,39.803 160.916,40.461 161.027,40.573 162.545,40.573 163.124,41.152 ; v1(163.102,41.458) 163.124,41.435 163.124,41.152 ; U1.27 164.823,44.208 164.597,43.982 164.597,43.077 164.752,42.921 164.752,41.952 164.444,41.644 163.898,41.644 163.407,41.152 163.124,41.152
  Bottom Layer w0.127: v1(163.102,41.458) 163.238,41.594 164.477,41.594 164.915,41.155 TP3.0
SYNC: R6.1 U1.2 U2.9 | length 15.8
  Top Layer w0.127: U2.9 162.554,38.47 163.069,38.985 163.069,39.691 R6.1 163.51,40.537 164.109,41.136 164.659,41.136 164.668,41.144 164.84,41.144 165.582,41.886 165.582,41.898 166.811,43.128 166.811,47.304 166.732,47.384 166.028,47.384 165.726,47.082 164.782,47.082 164.568,46.868 164.306,46.868 163.937,47.237 U1.2
TX: TP2.0 U1.31 | length 2.4
  Top Layer w0.127: U1.31 v1(166.2,46.207)
  Bottom Layer w0.127: TP2.0 164.856,46.207 v1(166.2,46.207)
VCC: "Bluetooth Low Energy IC.1" "Bluetooth Low Energy IC.9" "Bluetooth Low Energy IC.24" "Bluetooth Low Energy IC.26" "Bluetooth Low Energy IC.29" C2.2 C3.2 C12.2 P2.1 R1.2 R3.2 R4.2 R5.2 R6.2 R9.1 TP6.0 U1.4 U1.6 U1.18 U2.17 U4.5 | length 78.5
  Top Layer w0.127: U2.17 159.864,35.787 160.233,35.787 160.345,35.898 160.345,36.717 160.264,36.798 160.264,37.632 159.677,38.219 159.677,39.097 v1@159.909,39.329 ; R3.2 R4.2 ; U1.18 161.437,41.768 161.686,41.768 161.951,41.504 162.077,41.504 v1(162.166,41.414) ; U1.6 161.942,47.513 161.942,48.076 162.234,48.076 162.306,48.148 162.775,48.148 162.879,48.045 ; 162.937,47.987 162.937,48.074 163.048,48.185 164.223,48.185 164.448,48.41 v1(165.376,48.41) ; R5.2 R6.2 ; 164.876,35.603 C2.2 165.653,34.826 R9.1 ; 168.627,38.122 169.174,38.122 ; 168.627,39.622 169.153,39.622 ; 169.426,40.921 169.426,40.269 169.268,40.111 169.268,39.737 169.153,39.622 ; 169.427,35.822 169.432,35.827 169.432,36.388 169.268,36.553 169.268,38.029 169.174,38.122 ; 169.153,39.622 169.306,39.47 169.306,38.253 169.174,38.122
  Top Layer w0.254: v1@159.945,39.346 160.174,39.117 R3.2 ; R1.2 160.948,49.327 v1(160.948,49.954) ; R6.2 164.725,40.446 v1(164.957,40.446) ; 164.876,35.603 164.876,36.03 v1(164.884,36.038) ; v1(167.742,42.875) 167.587,42.721 167.587,41.874 C3.2 167.95,41.464 168.493,40.921 169.426,40.921 ; 173.727,36.622 173.955,36.394 173.955,36.108 v1(173.79,36.108)
  Mid-Layer 1 w0.254: v1(159.918,39.319) 160.201,39.036 161.413,39.036 ; v1(164.884,36.038) 164.412,36.038 161.413,39.036 ; v1(164.957,40.446) 164.085,39.573 162.045,39.573 161.508,39.036 161.413,39.036
  Bottom Layer w0.127: v1@161.973,41.481 v1@161.973,41.501
  Bottom Layer w0.254: P2.1 165.364,43.126 166.114,43.875 ; v1(160.948,49.954) 161.182,49.719 163.654,49.719 164.963,48.41 v1(165.376,48.41) 165.607,48.41 166.873,47.143 166.873,44.826 v1(166.345,44.298) v1@166.548,44.298 ; v1@161.973,41.481 161.973,41.172 162.176,40.969 162.872,40.969 162.891,40.95 163.312,40.95 163.331,40.969 164.231,40.969 v1@164.741,40.459 ; v1@161.973,41.501 161.976,41.504 162.065,41.414 v1(162.166,41.414) ; v1(164.884,36.038) 170.341,36.038 170.496,35.883 ; v1(164.957,40.446) 165.007,40.396 165.895,40.396 166.551,41.052 ; 166.548,44.074 167.587,43.035 167.587,43.029 v1(167.742,42.875) ; v1@166.548,44.259 166.164,43.875 166.114,43.875 ; TP6.0 167.027,40.576 166.551,41.052 ; U4.5 170.496,35.028 170.496,35.883 ; v1(173.79,36.108) 172.964,36.108 172.681,36.392 171.97,36.392 171.465,35.887 C12.2 170.5,35.887 170.496,35.883 ; 166.114,43.875 167.564,42.425 167.564,42.004 167.266,41.707 167.206,41.707 166.551,41.052
VIN: *.2 pad.3@165.3,37.6 | length 3.6
  Bottom Layer w0.254: *.2 164.58,38.319 pad.3@165.3,37.6
pads on no net: "Bluetooth Low Energy IC.6" "Bluetooth Low Energy IC.7" "Bluetooth Low Energy IC.10" "Bluetooth Low Energy IC.15" "Bluetooth Low Energy IC.32" *.0 *.1 *.NC A1.2 B1.6 U1.9 U1.10 U1.12 U1.19 U1.22 U1.23 U1.24 U1.25 U1.26 U2.3 U2.6 U2.7 U2.24 U2.25 U2.29 U4.4

## Polygon pours and split planes (outlines as drawn)
GND on Top Layer "Top Layer-No Net" (solid, remove dead copper, pour order 8): 174.565,40.91 164.306,40.91 164.298,40.918 164.298,52.338 164.324,52.364 164.429,52.469 167.861,52.469 167.9,52.43 167.9,45.369 167.913,45.382 174.57,45.382 174.549,45.361 174.549,41.559 174.533,41.542 174.533,40.934
GND on Internal Plane 1 (split plane): 167.083,52.238 167.523,52.209 167.853,52.173 167.853,45.343 174.436,45.343 174.436,33.956 174.419,33.916 174.41,33.849 174.413,33.83 174.411,33.83 174.417,33.731 174.415,33.721 174.417,33.711 174.408,33.56 174.381,33.402 174.337,33.247 174.275,33.098 174.197,32.957 174.104,32.826 173.997,32.706 173.877,32.599 173.746,32.506 173.605,32.428 173.456,32.366 173.301,32.322 173.166,32.299 173.166,32.312 173.162,32.314 173.14,32.305 173.141,32.298 171.511,32.332 171.508,32.331 171.505,32.332 171.477,32.328 171.477,32.329 171.449,32.325 171.444,32.324 171.328,32.307 171.155,32.264 171.084,32.238 162.992,32.238 162.904,32.27 162.731,32.313 162.555,32.339 162.376,32.348 162.198,32.339 162.195,32.339 162.195,32.353 162.175,32.345 162.176,32.338 160.461,32.322 160.436,32.318 160.436,32.319 160.28,32.31 160.119,32.319 159.961,32.346 159.806,32.391 159.657,32.452 159.517,32.53 159.385,32.623 159.265,32.73 159.158,32.85 159.065,32.982 158.987,33.122 158.926,33.271 158.881,33.426 158.862,33.538 158.86,33.538 158.856,33.568 158.83,33.63 158.806,33.661 158.806,48.504 158.814,48.513 158.83,48.552 158.897,48.637 159.188,48.968 159.493,49.287 159.812,49.592 160.143,49.883 160.487,50.159 160.843,50.42 161.21,50.665 161.587,50.893 161.974,51.106 162.369,51.301 162.773,51.478 163.184,51.638 163.602,51.78 164.025,51.903 164.454,52.008 164.886,52.094 165.322,52.161 165.761,52.209 166.201,52.238 166.642,52.248

## Keep-outs
Keep-Out Layer:
  lines w0.127: 174.571,48.711 174.628,48.654

## Other copper
Internal Plane 1 (plane layer: these items are gaps in the copper):
  rectangle: 167.853,45.343 174.658,52.633
  rectangle: 158.33,9.832 174.999,32.238

## Silkscreen, mask and mechanical layers (free items; w line width, h text height)
Top Overlay:
  rectangle: 164.747,45.373 164.842,45.883
  rectangle: 164.764,46.67 164.859,47.179
  lines w0.127: 166.399,51.541 166.399,52.118 ; 165.924,51.553 165.924,52.136 166.429,51.806 165.924,51.553
Bottom Overlay:
  lines w0.127: 173.505,34.505 173.905,35.37 ; 159.742,24.489 ccw(c161.727,24.493) 163.713,24.5 ccw(c161.728,24.442) 159.742,24.489 ; 159.842,14.834 cw(c161.828,14.788) 163.814,14.846 cw(c161.828,14.839) 159.842,14.834 ; 159.867,19.737 cw(c161.853,19.69) 163.839,19.748 cw(c161.853,19.741) 159.867,19.737 ; 164.644,24.388 cw(c166.63,24.341) 168.616,24.399 cw(c166.63,24.392) 164.644,24.388 ; 164.795,14.759 cw(c166.781,14.712) 168.767,14.77 cw(c166.781,14.763) 164.795,14.759 ; 164.795,19.586 cw(c166.781,19.539) 168.767,19.597 cw(c166.781,19.59) 164.795,19.586 ; 169.547,24.388 cw(c171.533,24.341) 173.518,24.399 cw(c171.533,24.392) 169.547,24.388 ; 169.647,14.709 cw(c171.633,14.662) 173.619,14.72 cw(c171.633,14.713) 169.647,14.709 ; 169.647,19.561 cw(c171.633,19.514) 173.619,19.572 cw(c171.633,19.565) 169.647,19.561
  text "INT" at 165.488,50.581 h0.76
  text "gnd" at 163.358,49.24 h0.76
  text "reset" at 164.524,47.917 h0.76
  text "gnd" at 167.487,47.296 h0.76
  text "sck" at 163.007,46.539 h0.76
  text "TX" at 166.847,45.862 h0.76
  text "mosi" at 163.613,45.315 h0.76
  text "RX" at 166.78,44.615 h0.76
  text "miso" at 163.77,44.153 h0.76
  text "SCL" at 167.313,43.05 h0.76
  text "Vcc" at 163.225,42.735 h0.76
  text "SDA" at 164.856,41.402 h0.76
  text "rstBT" at 171.567,40.448 h0.76
  text "req" at 163.564,40.406 h0.76
  text "_" at 169.411,39.322 h1.52
  text "RDY" at 172.794,38.617 h0.76
  text "Vcc" at 168.025,38.573 h0.76
  text "+" at 162.651,36.803 h1.52
  text "RSTt" at 161.881,35.9 h0.76
  text "14" at 167.672,23.706 h1.52
  text "7" at 161.984,23.66 h1.52
  text "2" at 171.906,23.561 h1.52
  text "9" at 162.379,18.899 h1.52
  text "12" at 167.855,18.869 h1.52
  text "1" at 171.84,18.747 h1.52
  text "11" at 167.672,14.032 h1.52
  text "10" at 163.078,13.94 h1.52
  text "0" at 172.052,13.925 h1.52
Mechanical 1:
  lines w0.127: 158.609,48.585 cw(c166.642,42.138) 174.622,48.649 ; 158.614,48.581 158.614,33.565 ccw(c160.23,33.745) 160.409,32.13 ; 158.753,26.92 cw(c160.368,27.099) 160.188,28.715 ; 158.754,26.92 158.754,13.715 ccw(c166.75,20.206) 174.736,13.702 174.736,27.291 ; 160.188,28.712 162.195,28.729 ccw(c162.374,30.344) 163.99,30.165 163.99,30.71 ; 160.46,32.13 162.197,32.146 cw(c162.376,30.53) 163.992,30.71 ; 171.839,28.742 172.941,28.738 cw(c173.121,27.122) 174.736,27.302 ; 171.862,28.742 cw(c171.683,30.358) 170.067,30.178 170.067,30.345 cw(c171.683,30.524) 171.503,32.14 173.162,32.105 ccw(c172.982,33.721) 174.598,33.897 ; 174.628,33.9 174.628,48.654 ; 182.326,26.754 182.326,13.549 ccw(c190.322,20.041) 198.308,13.537 198.308,27.126 ; 196.513,28.572 cw(c196.693,26.957) 198.309,27.137

## Text inside footprints (layer, text, board x,y; h text height)
A1: Top Overlay "-" at 170.056,47.763 h0.7 r90
B1: Top Overlay "o" at 169.626,44.953 h0.7 r90